# Altium PCB RF_AMPL_001.PcbDoc (part 2 of 2)
Units mm, origin at the board's own origin, x right, y up, seen from the top; angles counter-clockwise.
Board outline 150 x 92 mm, 2 copper layers (TOP, BOT), stack 1.1 mm thick; 102 components, 48 nets, 245 pads, 883 vias.
Unrouted connection lines stored in the file: 56.
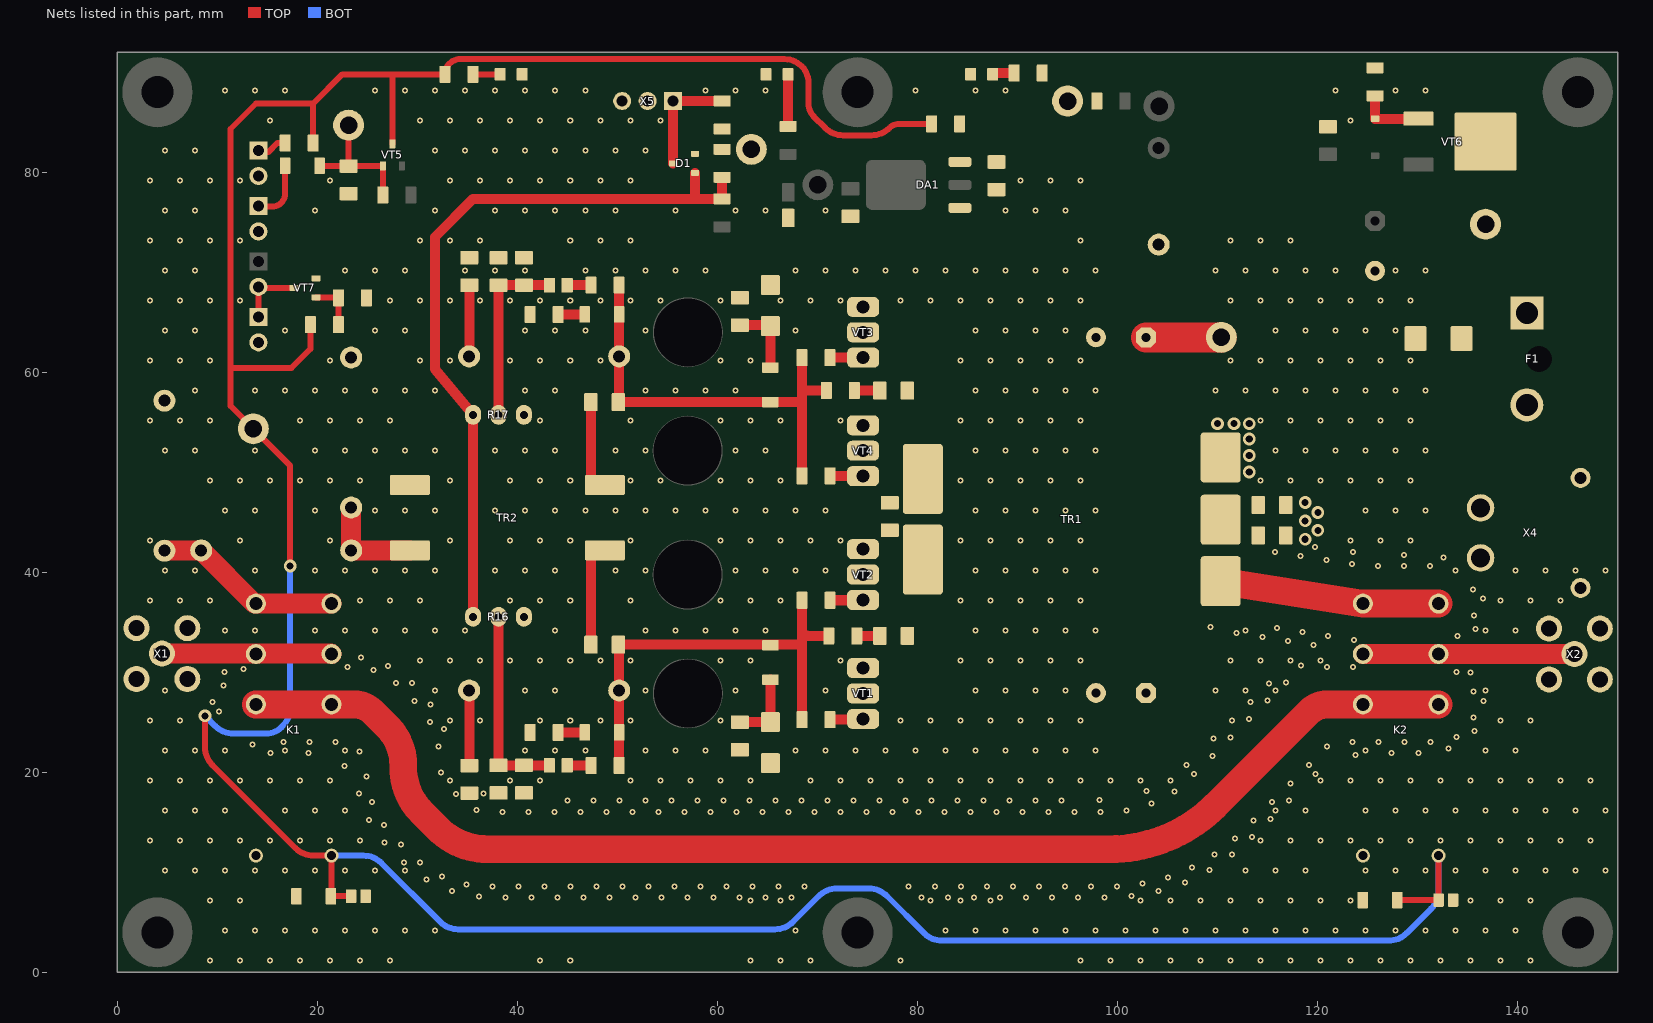
[diagram p2: the nets of this part, all layers, seen from the top]

## Via types
v1: diameter 0.6, hole 0.3, TOP to BOT, tented both sides, 868 vias
v2: diameter 1.27, hole 0.711, TOP to BOT, tented both sides, 15 vias

## Nets (pads, with @x,y where several pads share a name; then routed paths per layer and width w, separated by ;. In a path a pad name is that pad's centre, name@x,y a point inside that pad or via, vN(x,y) a via of type N, cw(c..) or ccw(c..) an arc to the next point about the centre after c; other vN are vias at no path point) (continued)
+12V_TX: C4.2 C5.2 K1.2 K2.2 R11.2 R24.1 R28.1 R29.1 TP2.1 VD1.CA VD2.CA VT5.3 | length 329.8
  TOP w0.6: v2(8.763,25.654) 8.763,22.515 ccw(c11.303,22.515) 9.507,20.719 17.805,12.421 ccw(c19.601,14.217) 19.601,11.677 K1.2@21.403,11.677 21.403,7.782 cw(c21.174,7.782) VD1.CA@21.336,7.62 21.403,7.62 C4.2@23.368,7.62 ; 11.305,70.993 11.303,70.995 ; v2(17.272,40.64) 17.272,50.673 TP2.1@13.589,54.356 11.303,56.642 11.303,60.452 ; R29.1@19.298,64.77 19.298,62.351 17.399,60.452 11.303,60.452 ; R28.1@19.564,82.931 19.564,86.874 ; VT5.3@27.493,82.845 27.493,89.789 ; R11.2@81.401,84.836 78.161,84.836 ccw(c78.161,83.474) 77.198,84.437 cw(c75.402,86.233) 75.402,83.693 72.553,83.693 cw(c72.553,86.233) 70.757,84.437 69.636,85.558 cw(c70.96,86.881) 69.088,86.881 69.088,88.928 ccw(c66.703,88.928) 68.389,90.614 ccw(c66.703,88.928) 66.703,91.313 34.284,91.313 ccw(c34.284,89.789) R24.1@32.76,89.789 27.493,89.789 ; VD2.CA@127.963,7.239 C5.2@132.08,7.239 K2.2@132.08,11.677 ; 11.303,60.452 11.303,70.995 ; 11.303,70.995 11.303,84.328 13.849,86.874 19.564,86.874 ; 19.564,86.874 22.479,89.789 27.493,89.789
  BOT w0.6: v2(8.763,25.654) 9.797,24.62 ccw(c11.593,26.416) 11.593,23.876 14.85,23.876 ccw(c14.85,26.044) 16.383,24.511 16.528,24.656 ccw(c14.732,26.452) 17.272,26.452 v2(17.272,40.64) ; K1.2@21.403,11.677 24.609,11.677 cw(c24.609,9.137) 26.405,10.933 32.276,5.062 ccw(c34.072,6.858) 34.072,4.318 65.75,4.318 ccw(c65.75,6.858) 67.546,5.062 70.122,7.638 cw(c71.918,5.842) 71.918,8.382 75.148,8.382 cw(c75.148,5.842) 76.944,7.638 80.663,3.919 ccw(c82.459,5.715) 82.459,3.175 127.091,3.175 ccw(c127.091,5.715) 128.887,3.919 131.336,6.368 ccw(c129.54,8.164) 132.08,8.164 K2.2@132.08,11.677
BIAS_A: C17.1 C18.1 L2.2 R16.2 | length 19.9
  TOP w1: R16.2@38.1,35.56 C18.1@38.1,20.701 C17.1@40.64,20.701 L2.2@43.188,20.701
BIAS_B: C19.1 C20.1 L3.2 R17.2 | length 18
  TOP w1: R17.2@38.1,55.753 C19.1@38.1,68.707 C20.1@40.64,68.707 L3.2@43.188,68.707
GND: C2.1 C4.1 C5.1 C6.1 C7.1 C8.1 C11.2 C12.2 C13.1 C14.1 C15.1 C16.2 C17.2 C18.2 C19.2 C20.2 C22.2 C23.2 C24.2 C25.2 DA1.1 HG1.CA HG2.CA HG3.CA K1.1 K2.1 R1.2 R4.2 R16.3 R17.3 R21.2 R22.2 R26.2 R30.1 TR1.1 TR2.1 VD1.AN VD2.AN VD6.AN VD8.AN VD10.AN1 VT1.3 VT2.3 VT3.3 VT4.3 VT7.2 X1.2 X2.2 X3.2 X4.1 X4.MP X5.2 X5.3 X6.2 X8.2
  other v1: 9.272,1.18 12.272,1.18 15.272,1.18 18.272,1.18 21.272,1.18 24.272,1.18 27.272,1.18 42.272,1.18 45.272,1.18 63.272,1.18 66.272,1.18 69.272,1.18 78.272,1.18 96.272,1.18 99.272,1.18 102.272,1.18 105.272,1.18 108.272,1.18 111.272,1.18 114.272,1.18 117.272,1.18 120.272,1.18 123.272,1.18 126.272,1.18 129.272,1.18 132.272,1.18 135.272,1.18 138.272,1.18 141.272,1.18 10.772,4.18 13.772,4.18 16.772,4.18 19.772,4.18 22.772,4.18 25.772,4.18 28.772,4.18 31.772,4.18 67.772,4.18 82.772,4.18 85.772,4.18 88.772,4.18 91.772,4.18 94.772,4.18 97.772,4.18 100.772,4.18 103.772,4.18 106.772,4.18 109.772,4.18 112.772,4.18 115.772,4.18 118.772,4.18 121.772,4.18 124.772,4.18 127.772,4.18 130.772,4.18 133.772,4.18 136.772,4.18 139.772,4.18 9.272,7.18 12.272,7.18 63.272,7.18 66.272,7.18 81.272,7.18 84.272,7.18 87.272,7.18 102.272,7.18 105.272,7.18 108.272,7.18 111.272,7.18 114.272,7.18 117.272,7.18 120.272,7.18 123.272,7.18 135.272,7.18 138.272,7.18 141.272,7.18 38.814,7.471 41.414,7.471 44.014,7.471 46.614,7.471 49.214,7.471 51.814,7.471 54.414,7.471 57.014,7.471 59.614,7.471 62.214,7.471 64.814,7.471 67.414,7.471 80.414,7.471 83.014,7.471 85.614,7.471 88.214,7.471 90.814,7.471 93.414,7.471 96.02,7.471 98.679,7.488 36.173,7.581 101.4,7.656 33.469,8.121 104.104,8.149 37.514,8.581 40.114,8.581 42.714,8.581 45.314,8.581 47.914,8.581 50.514,8.581 53.114,8.581 55.714,8.581 58.314,8.581 60.914,8.581 63.514,8.581 66.114,8.581 68.714,8.581 79.114,8.581 81.714,8.581 84.314,8.581 86.914,8.581 89.514,8.581 92.114,8.581 94.714,8.581 97.314,8.581 99.914,8.607 34.923,8.796 102.499,8.885 106.713,9.013 30.883,9.294 105.021,9.516 32.453,9.607 4.772,10.18 7.772,10.18 10.772,10.18 13.772,10.18 16.772,10.18 19.772,10.18 22.772,10.18 25.772,10.18 28.772,10.18 112.772,10.18 115.772,10.18 118.772,10.18 124.772,10.18 127.772,10.18 130.772,10.18 133.772,10.18 136.772,10.18 139.772,10.18 142.772,10.18 145.772,10.18 148.772,10.18 109.173,10.233 107.429,10.497 30.244,10.978 28.626,11 111.43,11.767 109.678,11.803 28.358,12.769 26.703,12.98 3.272,13.18 6.272,13.18 9.272,13.18 12.272,13.18 15.272,13.18 18.272,13.18 21.272,13.18 24.272,13.18 114.272,13.18 117.272,13.18 120.272,13.18 123.272,13.18 126.272,13.18 129.272,13.18 132.272,13.18 135.272,13.18 138.272,13.18 141.272,13.18 144.272,13.18 147.272,13.18 111.728,13.402 113.439,13.518 26.648,14.726 113.592,15.214 25.138,15.258 115.296,15.349 38.486,16.057 41.086,16.057 43.686,16.057 46.286,16.057 48.886,16.057 51.486,16.057 54.086,16.057 56.686,16.057 59.285,16.057 61.885,16.057 64.485,16.057 67.085,16.057 69.685,16.057 72.285,16.057 74.885,16.057 77.485,16.057 80.085,16.057 82.685,16.057 85.285,16.057 87.885,16.057 90.485,16.057 93.085,16.057 95.685,16.057 98.285,16.057 4.772,16.18 7.772,16.18 10.772,16.18 16.772,16.18 19.772,16.18 22.772,16.18 100.883,16.18 115.772,16.18 118.772,16.18 124.772,16.18 127.772,16.18 130.772,16.18 133.772,16.18 136.772,16.18 139.772,16.18 142.772,16.18 145.772,16.18 148.772,16.18 35.893,16.254 103.39,16.866 25.447,17.033 115.43,17.053 44.986,17.167 47.586,17.167 50.186,17.167 52.786,17.167 55.386,17.167 57.985,17.167 60.585,17.167 63.185,17.167 65.785,17.167 68.385,17.167 70.985,17.167 73.585,17.167 76.185,17.167 78.785,17.167 81.385,17.167 83.985,17.167 86.585,17.167 89.185,17.167 91.785,17.167 94.385,17.167 117.134,17.187 98.197,17.225 33.845,17.856 24.135,17.912 36.594,17.897 105.675,18.107 102.872,18.153 117.269,18.891 3.272,19.18 6.272,19.18 9.272,19.18 12.272,19.18 15.272,19.18 18.272,19.18 21.272,19.18 33.272,19.18 39.272,19.18 42.272,19.18 51.272,19.18 54.272,19.18 57.272,19.18 60.272,19.18 63.272,19.18 69.272,19.18 72.272,19.18 75.272,19.18 78.272,19.18 81.272,19.18 84.272,19.18 87.272,19.18 90.272,19.18 93.272,19.18 96.272,19.18 99.272,19.18 102.272,19.18 105.272,19.18 120.272,19.18 123.272,19.18 126.272,19.18 129.272,19.18 132.272,19.18 135.272,19.18 138.272,19.18 141.272,19.18 144.272,19.18 147.272,19.18 24.884,19.571 107.628,19.824 119.771,19.825 32.361,19.99 22.689,20.627 106.859,20.735 119.107,20.73 109.467,21.662 123.794,21.746 15.289,21.949 19.08,21.949 127.399,21.949 130.096,21.958 24.197,22.078 4.772,22.18 7.772,22.18 10.772,22.18 16.772,22.18 22.772,22.18 40.772,22.18 43.772,22.18 46.772,22.18 52.772,22.18 55.772,22.18 58.772,22.18 67.772,22.18 70.772,22.18 73.772,22.18 76.772,22.18 79.772,22.18 82.772,22.18 85.772,22.18 88.772,22.18 91.772,22.18 94.772,22.18 97.772,22.18 124.772,22.18 136.772,22.18 139.772,22.18 133.095,22.377 120.946,22.568 32.123,22.58 13.513,22.772 16.589,23.059 19.189,23.059 21.789,23.059 123.499,23.059 126.099,23.059 128.699,23.059 131.299,23.059 109.601,23.366 111.305,23.501 133.859,23.515 135.685,24.128 32.653,24.317 31.243,25.026 3.272,25.18 6.272,25.18 33.272,25.18 36.272,25.18 42.272,25.18 45.272,25.18 48.272,25.18 51.272,25.18 60.272,25.18 78.272,25.18 81.272,25.18 84.272,25.18 87.272,25.18 90.272,25.18 93.272,25.18 96.272,25.18 138.272,25.18 141.272,25.18 111.44,25.204 113.143,25.339 135.566,25.476 10.178,26.106 31.316,26.798 9.505,27.048 113.278,27.043 29.712,27.127 136.552,27.132 114.982,27.178 135.584,28.076 4.772,28.18 31.772,28.18 40.772,28.18 43.772,28.18 52.772,28.18 61.772,28.18 70.772,28.18 85.772,28.18 88.772,28.18 91.772,28.18 94.772,28.18 109.772,28.18 112.772,28.18 115.772,28.18 136.772,28.18 10.618,28.669 115.131,28.876 29.45,28.918 27.862,28.954 116.84,28.996 135.265,29.97 10.723,30.017 133.897,30.055 25.599,30.235 12.626,30.322 23.017,30.535 120.942,30.535 123.542,30.535 27.068,30.628 118.308,30.682 30.272,31.18 33.272,31.18 36.272,31.18 39.272,31.18 42.272,31.18 45.272,31.18 48.272,31.18 51.272,31.18 60.272,31.18 63.272,31.18 72.272,31.18 84.272,31.18 87.272,31.18 90.272,31.18 93.272,31.18 96.272,31.18 111.272,31.18 114.272,31.18 117.272,31.18 120.272,31.18 24.372,31.491 119.597,32.745 117.029,33.149 123.622,33.234 114.461,33.554 121.054,33.639 133.968,33.661 111.892,33.959 118.486,34.043 10.772,34.18 13.772,34.18 19.772,34.18 22.772,34.18 25.772,34.18 28.772,34.18 31.772,34.18 34.772,34.18 43.772,34.18 52.772,34.18 55.772,34.18 58.772,34.18 61.772,34.18 64.772,34.18 85.772,34.18 88.772,34.18 91.772,34.18 94.772,34.18 97.772,34.18 112.772,34.18 136.772,34.18 139.772,34.18 135.773,34.335 115.917,34.448 109.291,34.54 135.61,35.677 3.272,37.18 6.272,37.18 9.272,37.18 24.272,37.18 27.272,37.18 30.272,37.18 39.272,37.18 42.272,37.18 45.272,37.18 51.272,37.18 60.272,37.18 63.272,37.18 66.272,37.18 84.272,37.18 87.272,37.18 90.272,37.18 93.272,37.18 96.272,37.18 138.272,37.18 141.272,37.18 144.272,37.18 136.537,37.366 135.534,38.276 4.772,40.18 7.772,40.18 13.772,40.18 19.772,40.18 22.772,40.18 25.772,40.18 28.772,40.18 31.772,40.18 37.772,40.18 40.772,40.18 43.772,40.18 49.772,40.18 52.772,40.18 61.772,40.18 64.772,40.18 67.772,40.18 70.772,40.18 85.772,40.18 88.772,40.18 91.772,40.18 94.772,40.18 97.772,40.18 139.772,40.18 142.772,40.18 145.772,40.18 148.772,40.18 133.784,40.198 126.017,40.615 128.617,40.615 131.217,40.615 123.426,40.834 120.858,41.238 132.589,41.509 118.29,41.643 128.641,41.725 115.721,42.047 123.547,42.029 119.746,42.536 3.272,43.18 12.272,43.18 21.272,43.18 33.272,43.18 39.272,43.18 42.272,43.18 45.272,43.18 51.272,43.18 60.272,43.18 63.272,43.18 66.272,43.18 69.272,43.18 72.272,43.18 84.272,43.18 87.272,43.18 90.272,43.18 93.272,43.18 96.272,43.18 123.272,43.18 126.272,43.18 129.272,43.18 10.772,46.18 13.772,46.18 19.772,46.18 25.772,46.18 28.772,46.18 31.772,46.18 37.772,46.18 40.772,46.18 43.772,46.18 46.772,46.18 49.772,46.18 52.772,46.18 55.772,46.18 58.772,46.18 61.772,46.18 64.772,46.18 67.772,46.18 70.772,46.18 85.772,46.18 88.772,46.18 91.772,46.18 94.772,46.18 97.772,46.18 124.772,46.18 127.772,46.18 130.772,46.18 9.272,49.18 12.272,49.18 15.272,49.18 18.272,49.18 21.272,49.18 24.272,49.18 33.272,49.18 39.272,49.18 42.272,49.18 45.272,49.18 51.272,49.18 54.272,49.18 60.272,49.18 63.272,49.18 66.272,49.18 84.272,49.18 87.272,49.18 90.272,49.18 93.272,49.18 96.272,49.18 114.272,49.18 117.272,49.18 120.272,49.18 123.272,49.18 126.272,49.18 129.272,49.18 4.772,52.18 7.772,52.18 13.772,52.18 19.772,52.18 22.772,52.18 25.772,52.18 28.772,52.18 31.772,52.18 37.772,52.18 40.772,52.18 43.772,52.18 49.772,52.18 52.772,52.18 61.772,52.18 64.772,52.18 85.772,52.18 88.772,52.18 91.772,52.18 94.772,52.18 97.772,52.18 115.772,52.18 118.772,52.18 121.772,52.18 124.772,52.18 127.772,52.18 130.772,52.18 3.272,55.18 6.272,55.18 9.272,55.18 18.272,55.18 21.272,55.18 24.272,55.18 27.272,55.18 42.272,55.18 51.272,55.18 60.272,55.18 63.272,55.18 66.272,55.18 72.272,55.18 84.272,55.18 87.272,55.18 90.272,55.18 93.272,55.18 96.272,55.18 114.272,55.18 117.272,55.18 120.272,55.18 123.272,55.18 126.272,55.18 129.272,55.18 7.772,58.18 13.772,58.18 16.772,58.18 19.772,58.18 22.772,58.18 25.772,58.18 28.772,58.18 31.772,58.18 40.772,58.18 43.772,58.18 52.772,58.18 55.772,58.18 58.772,58.18 61.772,58.18 85.772,58.18 88.772,58.18 91.772,58.18 94.772,58.18 97.772,58.18 109.772,58.18 112.772,58.18 115.772,58.18 118.772,58.18 121.772,58.18 124.772,58.18 127.772,58.18 130.772,58.18 3.272,61.18 6.272,61.18 9.272,61.18 21.272,61.18 30.272,61.18 33.272,61.18 39.272,61.18 42.272,61.18 45.272,61.18 48.272,61.18 60.272,61.18 63.272,61.18 84.272,61.18 87.272,61.18 90.272,61.18 93.272,61.18 96.272,61.18 111.272,61.18 114.272,61.18 117.272,61.18 120.272,61.18 123.272,61.18 126.272,61.18 129.272,61.18 4.772,64.18 7.772,64.18 16.772,64.18 25.772,64.18 28.772,64.18 40.772,64.18 43.772,64.18 46.772,64.18 52.772,64.18 67.772,64.18 85.772,64.18 88.772,64.18 91.772,64.18 94.772,64.18 115.772,64.18 118.772,64.18 121.772,64.18 124.772,64.18 127.772,64.18 3.272,67.18 6.272,67.18 9.272,67.18 12.272,67.18 27.272,67.18 30.272,67.18 33.272,67.18 36.272,67.18 39.272,67.18 42.272,67.18 45.272,67.18 48.272,67.18 51.272,67.18 54.272,67.18 60.272,67.18 66.272,67.18 69.272,67.18 72.272,67.18 78.272,67.18 81.272,67.18 84.272,67.18 87.272,67.18 90.272,67.18 93.272,67.18 96.272,67.18 111.272,67.18 114.272,67.18 117.272,67.18 120.272,67.18 123.272,67.18 126.272,67.18 129.272,67.18 4.772,70.18 7.772,70.18 22.772,70.18 25.772,70.18 28.772,70.18 34.772,70.18 37.772,70.18 40.772,70.18 46.772,70.18 49.772,70.18 52.772,70.18 55.772,70.18 58.772,70.18 67.772,70.18 70.772,70.18 73.772,70.18 76.772,70.18 79.772,70.18 82.772,70.18 85.772,70.18 88.772,70.18 91.772,70.18 94.772,70.18 97.772,70.18 109.772,70.18 112.772,70.18 115.772,70.18 118.772,70.18 121.772,70.18 127.772,70.18 130.772,70.18 3.272,73.18 6.272,73.18 9.272,73.18 12.272,73.18 30.272,73.18 33.272,73.18 36.272,73.18 45.272,73.18 48.272,73.18 51.272,73.18 96.272,73.18 111.272,73.18 114.272,73.18 117.272,73.18 4.772,76.18 7.772,76.18 19.772,76.18 31.772,76.18 37.772,76.18 40.772,76.18 43.772,76.18 46.772,76.18 49.772,76.18 55.772,76.18 61.772,76.18 64.772,76.18 70.772,76.18 88.772,76.18 91.772,76.18 94.772,76.18 3.272,79.18 6.272,79.18 9.272,79.18 12.272,79.18 21.272,79.18 33.272,79.18 36.272,79.18 39.272,79.18 42.272,79.18 45.272,79.18 48.272,79.18 51.272,79.18 90.272,79.18 93.272,79.18 96.272,79.18 4.772,82.18 7.772,82.18 31.772,82.18 34.772,82.18 37.772,82.18 40.772,82.18 43.772,82.18 46.772,82.18 49.772,82.18 52.772,82.18 15.272,85.18 30.272,85.18 33.272,85.18 36.272,85.18 39.272,85.18 42.272,85.18 45.272,85.18 48.272,85.18 51.272,85.18 54.272,85.18 123.272,85.18 10.772,88.18 13.772,88.18 16.772,88.18 25.772,88.18 28.772,88.18 31.772,88.18 34.772,88.18 37.772,88.18 40.772,88.18 43.772,88.18 46.772,88.18 58.772,88.18 61.772,88.18 64.772,88.18 79.772,88.18 85.772,88.18 88.772,88.18 121.772,88.18 127.772,88.18 130.772,88.18
  other v2: 118.745,43.307 120.015,44.196 118.745,45.148 120.015,45.974 118.745,46.99 113.157,50.038 113.157,51.689 113.157,53.34 109.982,54.864 111.633,54.864 113.157,54.864
NetC1_1: C1.1 TR2.4 | length 9.4
  TOP w1: C1.1@47.342,32.766 TR2.4@47.342,42.196
NetC1_2: C1.2 R2.1 R5.1 R6.1 R9.1 R18.2 VD3.CA VD5.AN | length 44.8
  TOP w1: C1.2@50.092,32.766 50.165,32.693 R2.1@50.165,28.194 VD3.CA@50.165,24.003 R18.2@50.165,20.701 ; C1.2@50.395,32.766 68.447,32.766 ; R5.1@68.447,25.273 68.447,32.766 ; R6.1@68.447,37.211 68.447,33.914 ; R9.1@71.117,33.655 69.073,33.655 cw(c69.073,34.54) 68.447,33.914 ; 68.447,32.766 68.447,33.914
NetC2_2: C2.2 R2.2 | length 7.5
  TOP w1: C2.2@35.179,20.679 R2.2@35.179,28.194
NetC3_1: C3.1 TR2.2 | length 8.3
  TOP w1: TR2.2@47.342,48.736 C3.1@47.342,57.023
NetC3_2: C3.2 R3.1 R7.1 R8.1 R10.1 R19.2 VD4.CA VD7.AN | length 44.4
  TOP w1: R19.2@50.165,68.707 VD4.CA@50.165,65.786 R3.1@50.165,61.595 50.165,57.096 C3.2@50.092,57.023 VD7.AN@65.278,57.023 68.325,57.023 68.447,56.901 ; R8.1@68.447,49.657 68.447,56.901 ; R7.1@68.447,61.468 68.447,58.135 ; R10.1@70.873,58.181 68.557,58.181 ccw(c68.557,58.025) 68.447,58.135 ; 68.447,56.901 68.447,58.135
NetC6_2: C6.2 R3.2 | length 7.1
  TOP w1: R3.2@35.165,61.595 35.179,61.595 C6.2@35.179,68.707
NetC7_2: C7.2 VD5.CA VD6.CA | length 7.3
  TOP w1: C7.2@62.23,25.019 VD6.CA@65.278,25.019 VD5.CA@65.278,29.263
NetC8_2: C8.2 VD7.CA VD8.CA | length 7.3
  TOP w1: C8.2@62.23,64.717 65.278,64.717 VD7.CA@65.278,60.473
NetC9_1: C9.1 C21.2 TR1.3 VT1.2 VT2.2
NetC9_2: C9.2 R9.2 | length 2.3
  TOP w1: R9.2@73.917,33.655 C9.2@76.222,33.655
NetC10_1: C10.1 C21.1 TR1.5 VT3.2 VT4.2
NetC10_2: C10.2 R10.2 | length 2.6
  TOP w0.6: R10.2@73.673,58.181 ccw(c73.708,58.216) R10.2@73.708,58.166
  TOP w1: R10.2@73.708,58.166 C10.2@76.222,58.166
NetC11_1: C11.1 C12.1 C13.2 C14.2 L1.2 TP9.1 TR1.4 | length 7.5
  TOP w3: C12.1@102.83,63.5 TP9.1@110.363,63.5
NetC23_1: C23.1 DA1.3 R11.1 R23.2 R27.2 TP3.1
NetC25_1: C25.1 R14.1 TP8.1 VD9.AN VT5.1 | length 13.3
  TOP w0.6: VD9.AN@20.214,80.645 C25.1@23.114,80.645 ; TP8.1@23.114,84.709 C25.1@23.114,80.645 ; R14.1@26.543,77.724 VT5.1@26.543,80.645 C25.1@23.114,80.645
NetD1_1: D1.1 R12.2 R13.2 R16.1 R17.1 | length 74.3
  TOP w1: R16.1@35.56,35.56 R17.1@35.56,55.753 31.75,60.325 31.75,73.533 35.56,77.343 57.742,77.343 R12.2@60.452,77.343 R13.2@60.452,79.499 ; 57.742,77.482 D1.1@57.742,79.949
NetD1_2: D1.2 R13.1 R15.2 TP5.1
NetD1_3: D1.3 R15.1 X5.1 | length 11.1
  TOP w1: D1.3@55.542,80.899 X5.1@55.542,87.122 55.542,87.128 R15.1@60.452,87.128
NetF1_1: F1.1 TP7.1 VD10.AN2 VT6.2
NetF1_2: F1.2 X4.2
NetHG1_AN: HG1.AN R23.1 | length 2.2
  TOP w1: HG1.AN@87.503,89.916 R23.1@89.659,89.916
NetHG2_AN: HG2.AN R24.2 | length 2.7
  TOP w0.6: R24.2@35.56,89.789 HG2.AN@38.27,89.789
NetHG3_AN: HG3.AN R25.1 | length 5.3
  TOP w1: R25.1@67.056,84.588 HG3.AN@67.056,89.916
NetK1_3: K1.3 K1.4 K2.3 K2.4 | length 131.6
  TOP w2.77: K1.3@13.843,26.797 K1.4@21.403,26.797 23.713,26.797 cw(c23.713,24.257) 25.509,26.053 27.005,24.557 cw(c23.214,20.766) 28.575,20.766 28.575,20.487 ccw(c34.968,20.487) 30.448,15.966 32.027,14.387 ccw(c37.019,19.378) 37.019,12.319 99.182,12.319 ccw(c99.182,27.355) 109.814,16.723 119.144,26.053 cw(c120.94,24.257) 120.94,26.797 K2.4@132.08,26.797
NetK1_5: K1.5 K1.6 X1.1 | length 17
  TOP w2: X1.1@4.445,31.877 21.363,31.877 K1.6@21.403,31.837
NetK1_7: K1.7 K1.8 R20.1 R21.1 | length 18.9
  TOP w2: R21.1@4.699,42.164 8.343,42.164 R20.1@8.375,42.196 13.694,36.877 K1.7@13.843,36.877 K1.8@21.403,36.877
NetK2_5: K2.5 K2.6 X2.1 | length 21.1
  TOP w2: K2.5@124.52,31.837 X2.1@145.669,31.837
NetK2_7: K2.7 K2.8 TR1.2 | length 22
  TOP w2.77: TR1.2@110.305,39.116 K2.7@124.52,36.877 K2.8@132.08,36.877
NetL2_1: L2.1 R18.1 | length 2.4
  TOP w1: L2.1@44.958,20.701 R18.1@47.365,20.701
NetL3_1: L3.1 R19.1 | length 2.4
  TOP w1: L3.1@44.958,68.707 R19.1@47.365,68.707
NetR1_1: R1.1 VD3.AN | length 2.6
  TOP w1: R1.1@44.069,24.003 VD3.AN@46.715,24.003
NetR4_1: R4.1 VD4.AN | length 2.6
  TOP w1: R4.1@44.069,65.786 VD4.AN@46.715,65.786
NetR5_2: R5.2 VT1.1 | length 3.3
  TOP w1: R5.2@71.247,25.273 74.48,25.273 VT1.1@74.556,25.349
NetR6_2: R6.2 VT2.1 | length 3.3
  TOP w1: R6.2@71.247,37.211 74.52,37.211 VT2.1@74.549,37.24
NetR7_2: R7.2 VT3.1 | length 3.3
  TOP w1: R7.2@71.247,61.468 74.548,61.468 VT3.1@74.556,61.46
NetR8_2: R8.2 VT4.1 | length 3.3
  TOP w1: R8.2@71.247,49.657 74.511,49.657 VT4.1@74.549,49.619
NetR20_2: R20.2 R22.1 TR2.3 | length 10.2
  TOP w2: R22.1@23.368,46.482 23.368,42.203 R20.2@23.375,42.196 TR2.3@29.239,42.196
NetR26_1: R26.1 VD11.AN VT6.1 | length 6.6
  TOP w1: R26.1@125.73,87.63 VD11.AN@125.73,85.344 130.079,85.344 VT6.1@130.079,85.358
NetR28_2: R28.2 X6.1 | length 3.1
  TOP w0.6: X6.1@14.011,82.042 15.113,82.042 16.002,82.931 R28.2@16.764,82.931
NetR29_2: R29.2 R30.2 VT7.1 | length 4.9
  TOP w0.6: VT7.1@19.853,67.503 22.032,67.503 R30.2@22.098,67.437 R29.2@22.098,64.77
NetVD9_CA: VD9.CA X3.1 | length 6.2
  TOP w0.6: X3.1@14.097,76.581 15.494,76.581 ccw(c15.494,77.851) 16.764,77.851 VD9.CA@16.764,80.645
NetVT7_3: VT7.3 X7.2 X8.1 | length 6.6
  TOP w0.6: X8.1@14.097,65.532 X7.2@14.097,68.538 ; X7.2@14.097,68.453 VT7.3@17.653,68.453
pads on no net: F1.MH1

## Polygon pours and split planes (outlines as drawn)
GND on TOP "NONET_L-01_P-001" (solid, remove dead copper, pour order 16): 0,91.968 149.987,91.968 149.987,0.02 0,0.02
NetC11_1 on TOP "NONET_L-01_P-001" (solid, pour order 10): 99.695,75.311 99.695,22.225 108.204,22.225 108.204,42.545 115.57,42.545 115.57,47.879 108.204,47.879 108.204,75.311
+12V_IN on TOP "NONET_L-01_P-001" (solid, pour order 9): 99.695,92.075 99.695,75.438 118.745,75.438 118.745,73.025 131.953,73.025 131.953,83.185 118.745,83.185 118.745,91.948
GND on TOP "NONET_L-01_P-001" (solid, pour order 14): 116.078,47.879 116.078,42.545 120.65,42.545 120.65,47.879
NetC9_1 on TOP "NONET_L-01_P-001" (solid, pour order 5): 73.66,45.212 73.66,38.645 75.528,38.645 cw(c75.528,36.449) 77.724,36.449 77.724,31.242 cw(c75.602,31.242) 75.602,29.12 73.66,29.12 73.66,26.58 79.666,26.58 ccw(c79.666,29.718) 82.804,29.718 82.804,45.212
NetF1_2 on TOP "NONET_L-01_P-001" (solid, pour order 8): 132.08,61.214 149.987,61.214 149.987,42.545 132.08,42.545
NetC10_1 on TOP "NONET_L-01_P-001" (solid, pour order 4): 73.627,65.151 73.627,62.865 75.565,62.865 cw(c75.565,60.706) 77.724,60.706 77.724,55.499 cw(c75.565,55.499) 75.565,53.34 73.627,53.34 73.627,45.593 82.804,45.593 82.804,62.23 ccw(c79.883,62.23) 79.883,65.151
+5V on TOP "NONET_L-01_P-001" (solid, pour order 13): 81.28,83.185 81.28,73.66 76.2,73.66 74.168,75.692 74.168,76.835 68.58,76.835 62.103,76.835 62.103,80.01 65.405,80.01 65.405,83.185 76.2,83.185
NetD1_2 on TOP "NONET_L-01_P-001" (solid, pour order 12): 56.515,85.09 56.515,81.28 60.96,81.28 62.23,80.01 65.405,80.01 65.405,85.09
NetC23_1 on TOP "NONET_L-01_P-001" (solid, pour order 11): 82.931,86.995 82.931,80.01 99.06,80.01 99.06,92.075 91.186,92.075 91.186,86.995
NetF1_1 on TOP "NONET_L-01_P-001" (solid, pour order 7): 132.08,91.948 132.08,61.468 149.987,61.468 149.987,91.948
GND on BOT "NONET_L-01_P-001" (solid, pour order 15): 0,91.948 149.987,91.948 149.987,0 0,0

## Other copper
TOP:
  pour cut-out: 175 vertices and 0 holes, not listed, extent 106.882,33.445 135.507,42.539
  pour cut-out: 384 vertices and 0 holes, not listed, extent 10.416,8.887 135.507,30.229
Multi-Layer:
  pour cut-out: 4,83.972 cw(c4,88) -0.028,88 cw(c4,88) 4,92.028 cw(c4,88) 8.028,88 cw(c4,88)
  pour cut-out: 74,-0.028 cw(c74,4) 69.972,4 cw(c74,4) 74,8.028 cw(c74,4) 78.028,4 cw(c74,4)
  pour cut-out: 4,-0.028 cw(c4,4) -0.028,4 cw(c4,4) 4,8.028 cw(c4,4) 8.028,4 cw(c4,4)
  pour cut-out: 146,-0.028 cw(c146,4) 141.972,4 cw(c146,4) 146,8.028 cw(c146,4) 150.028,4 cw(c146,4)
  pour cut-out: 146,83.972 cw(c146,88) 141.972,88 cw(c146,88) 146,92.028 cw(c146,88) 150.028,88 cw(c146,88)
  pour cut-out: 74,83.972 cw(c74,88) 69.972,88 cw(c74,88) 74,92.028 cw(c74,88) 78.028,88 cw(c74,88)

## Silkscreen, mask and mechanical layers (free items; w line width, h text height)
Top Overlay:
  text "+5V" at 61.287,89.289 h1
  text "+13V" at 80.725,87.957 h1
  text "TX" at 41.602,86.687 h1
  text "13.6V" at 106.363,85.754 h1
  text "13.6V" at 90.107,84.02 h1
  text "5V" at 69.898,80.591 h1
  text "13.6V" at 138.958,74.451 h1
  text "15A" at 147.185,64.081 h1 r90
  text "MAX" at 30.001,55.241 h1.1
  text "MIN" at 43.303,55.241 h1.1
  text "+12V_Tx" at 8.074,50.786 h1
  text "VIN 13.6V" at 133.658,46.555 h1 r90
  text "MAX" at 30.001,35.048 h1.1
  text "MIN" at 43.303,35.048 h1.1
  text "RF_IN" at 1.901,25.96 h1.1
  text "RF_OUT" at 142.981,24.055 h1.1
  text "RF_AMPL_001_v1" at 29.573,4.814 h2
  text "@Vitech_UA" at 43.273,1.286 h2
  text "UR4UUZ" at 29.637,1.119 h2
  text "04.2026" at 80.183,1.119 h2
Board:
  the board outline again, w0.254
Title:
  lines w0.1: 198.8,199.4 266.75,199.4
  lines w0.127: -44.879,10.002 -39.799,10.002 ; -44.879,80.487 -39.799,80.487 ; -44.879,150.972 -39.799,150.972 ; 4.397,-60.483 4.397,-55.403 ; 4.397,216.377 4.397,221.457 ; 53.546,-60.483 53.546,-55.403 ; 53.546,216.377 53.546,221.457 ; 102.695,-60.483 102.695,-55.403 ; 102.695,216.377 102.695,221.457 ; 151.971,-60.483 151.971,-55.403 ; 151.971,216.377 151.971,221.457 ; 194.725,-55.375 194.725,-25.375 343.725,-25.375 ; 194.725,-50.375 343.725,-50.375 ; 194.725,-45.375 343.725,-45.375 ; 194.725,-35.375 343.725,-35.375 ; 201.12,-60.483 201.12,-55.403 ; 201.12,216.377 201.12,221.457 ; 209.725,-45.375 209.725,-35.375 ; 250.269,-60.483 250.269,-55.403 ; 250.269,216.377 250.269,221.457 ; 279.725,-55.375 279.725,-45.375 ; 299.545,-60.483 299.545,-55.403 ; 299.545,216.377 299.545,221.457 ; 328.725,-45.375 328.725,-35.375 ; 343.741,10.002 348.821,10.002 ; 343.741,80.487 348.821,80.487 ; 343.741,150.972 348.821,150.972 ; -44.879,-60.483 348.821,-60.483 348.821,221.457 -44.879,221.457 -44.879,-60.483 ; -39.799,-55.403 343.741,-55.403 343.741,216.377 -39.799,216.377 -39.799,-55.403
  text "1" at -20.842,218.028 h1.78
  text "2" at 28.197,218.028 h1.78
  text "3" at 77.456,218.028 h1.78
  text "4" at 126.749,218.028 h1.78
  text "5" at 176.025,218.028 h1.78
  text "6" at 225.047,218.028 h1.78
  text "7" at 274.577,218.028 h1.78
  text "8" at 323.599,218.028 h1.78
  text "NOTES: UNLESS OTHERWISE SPECIFIED." at 200.2,200.45 h2.5
  text "1. MATERIAL:BASE MATERIAL LAMINATED EPOXY GLASS (ANY COLOR)" at 200.35,194.4 h2.5
  text "GRADE NEMA FR-4. ALL SIDES 1 OZ COPPER PER MIL-P-13949." at 206.95,189.9 h2.5
  text "AND IS UL APPROVED MFR SOURCE WITH 1.6 mm +-10 PERCENT" at 206.95,186.2 h2.5
  text "A" at -42.974,184.043 h1.78
  text "A" at 345.646,184.043 h1.78
  text "2. SOLDER PLATE PER QQ-S-571." at 200.35,181.9 h2.5
  text "3. SILKSCREEN IS ABSENT." at 200.35,177.9 h2.5
  text "4. DIMENSIONS IN MILLIMETERS, (...) - FOR REFERENCE," at 200.3,173 h2.5
  text "TOLERANCE ARE: +-0.15; HOLES: +- 0.05." at 207.45,168.95 h2.5
  text "5. LIQUID PHOTO IMAGABLE SOLDERMASK ENTHRONE DSR3241" at 200.35,164.9 h2.5
  text "OR ALTERNATIVE." at 207.45,160.95 h2.5
  text "6.  FOR REF ONLY: THIS BOARD HAS SMD ON BOTH SIDES." at 200.35,156.9 h2.5
  text "7.  THE FINISH OF THE BOARD IS HASL." at 200.2,150.5 h2.5
  text "8. PCB stackup:" at 200.2,144.8 h2.5
  text "B" at -42.974,113.431 h1.78
  text "B" at 345.646,113.431 h1.78
  text "C" at -42.974,42.819 h1.78
  text "C" at 345.646,42.819 h1.78
  text "D" at -42.974,-27.285 h1.78
  text "D" at 345.646,-27.285 h1.78
  text "TITLE:" at 195.7,-27.8 h1.2
  text "SIZE:" at 195.7,-37.55 h1.2
  text "DWG NO:" at 210.7,-37.55 h1.2
  text "REV:" at 330.2,-37.55 h1.2
  text ".Project_Version" at 335.4,-38.7 h2.5
  text "A3" at 201.7,-42.3 h2.5
  text "DATE:" at 195.7,-47.55 h1.2
  text "PCB DESIGNER:" at 281.2,-47.55 h1.2
  text ".PRINT_DATE" at 209.2,-48.8 h2.5
  text "FILE NAME:" at 195.7,-52.55 h1.2
  text "SHEET:" at 280.95,-52.55 h1.2
  text ".PCB_FILE_NAME_NO_PATH" at 209.2,-53.8 h2.5
  text "1 OF 1" at 298.95,-54.05 h2.5
  text "1" at -20.842,-58.832 h1.78
  text "2" at 28.197,-58.832 h1.78
  text "3" at 77.456,-58.832 h1.78
  text "4" at 126.749,-58.832 h1.78
  text "5" at 176.025,-58.832 h1.78
  text "6" at 225.047,-58.832 h1.78
  text "7" at 274.577,-58.832 h1.78
  text "8" at 323.599,-58.832 h1.78

## Dimensions
0,92 to 150,0 on Dimensions
0,0 to 0,92 on Dimensions

## Text inside footprints (layer, text, board x,y; h text height)
C24: Top Assembly "A" at 66.756,77.003 h0.7 r270; Top Assembly "+" at 67.756,78.303 h0.3 r270
HG1: Top Assembly "2" at 87.303,89.914 h0.3 r180; Top Assembly "1" at 85.653,89.914 h0.3 r180
HG2: Top Assembly "1" at 40.12,89.664 h0.3; Top Assembly "2" at 38.47,89.664 h0.3
HG3: Top Assembly "1" at 65.206,89.914 h0.3 r180; Top Assembly "2" at 66.856,89.914 h0.3 r180
K1: Top Assembly "NC" at 18.118,26.002 h1 r90; Top Assembly "COM" at 18.168,30.502 h1 r90; Top Assembly "NO" at 18.168,35.952 h1 r90
K2: Top Assembly "NO" at 128.845,35.952 h1 r90; Top Assembly "COM" at 128.845,30.502 h1 r90; Top Assembly "NC" at 128.795,26.002 h1 r90
VT6: Top Assembly "4" at 137.129,83.308 h0.7 r270; Top Assembly "3" at 132.679,81.008 h0.7 r270; Top Assembly "1" at 132.679,85.458 h0.7 r270
X4: Top Assembly "1" at 139.08,42.042 h1.5 r180